# Altium PCB Analog_mic_breakout_rev.PcbDoc
Units mm, origin at the board's own origin, x right, y up, seen from the top; angles counter-clockwise.
Board outline 4.11 x 9 mm, 2 copper layers (Top Layer, Bottom Layer); 6 components, 4 nets, 15 pads, 2 vias.
Unrouted connection lines stored in the file: 6.
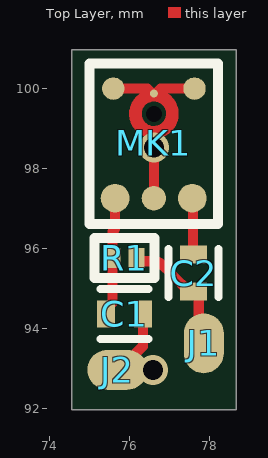
[diagram p0: Top Layer view]
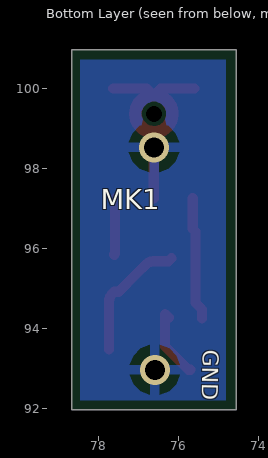
[diagram p1: Bottom Layer view, seen from below]
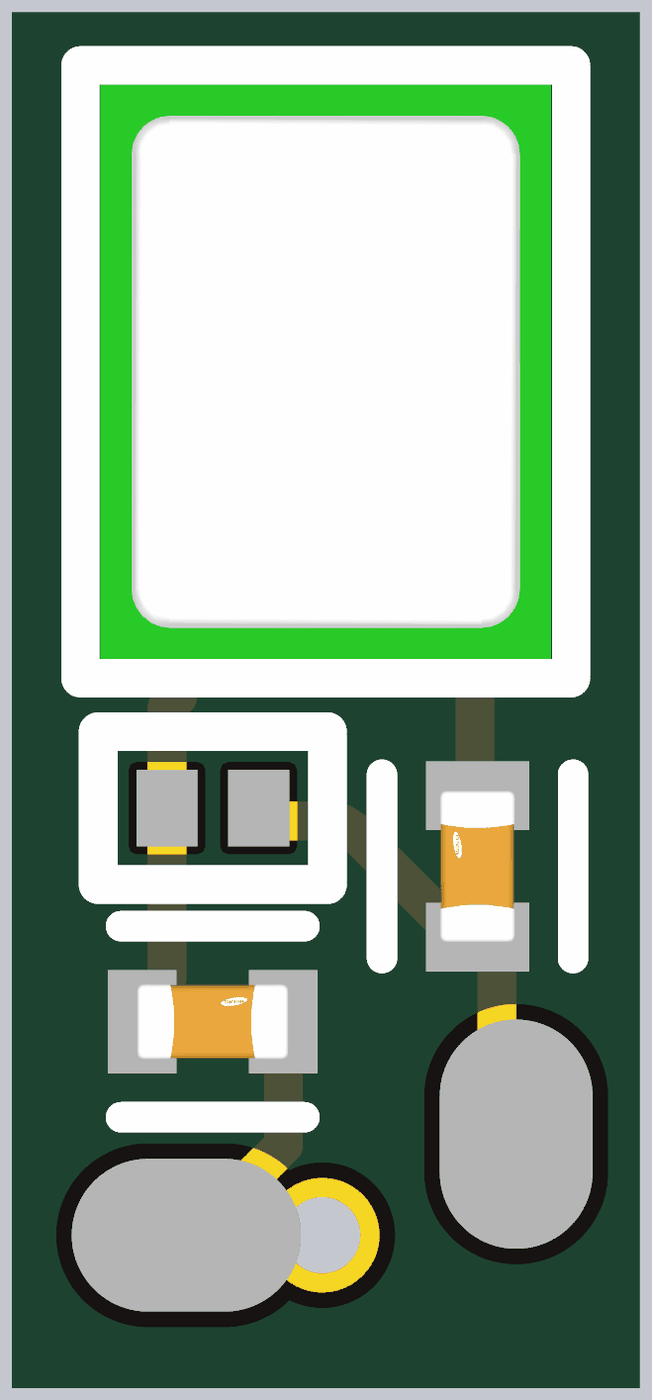
[diagram p2: 3D render of the assembled board from above, using the file's embedded part models]

## Layer stack, top to bottom
Top Solder: solder mask 0.0102, Solder Resist, Dk 3.5
Top Layer: signal copper 0.0356
Dielectric 1: dielectric 0.32, FR-4, Dk 4.8
Bottom Layer: signal copper 0.0356
Bottom Solder: solder mask 0.0102, Solder Resist, Dk 3.5

## Board outline
74.549,91.963 74.549,100.965 78.659,100.965 78.659,91.963

## Design rules (kind name [scope] priority, off if disabled: settings)
Clearance [All] p1: gap=0.1 ignorepadtopadclearanceinfootprint=FALSE except(0: Arc-Hole Track-Hole SMDPad-Hole THPad-Hole Via-Hole Fill-Hole Poly-Hole Region-Hole Text-Hole)
HoleToHoleClearance [All] p1: gap=0.1 allowstackedmicrovias=TRUE
MinimumSolderMaskSliver [All] p1: minsoldermaskwidth=0.08
PolygonConnect [All] p1: connectstyle=Relief reliefconductorwidth=0.254 reliefentries=4 polygonreliefangle="90 Angle" airgapwidth=0.254
RoomDefinition Analog_mic_breakout [InComponentClass('Analog_mic_breakout')] p1: confinementstyle=ConfineIn formatcopy=TRUE lockcomponents=FALSE outline 0,0 50.8,0 50.8,25.4 0,25.4
RoutingVias [All] p1: holewidth=0.711 width=1.27 viastyle="Through Hole" minholewidth=0.711 minwidth=1.27 maxholewidth=0.711 maxwidth=1.27
SilkToSolderMaskClearance [IsPad] p1: minsilkscreentomaskgap=0.1 clearancetoexposedcopper=TRUE
SolderMaskExpansion [All] p1: expansion=0.102 istentingtop=FALSE
Width [All] p1: maxlimit=0.315 minlimit=0.15 preferedwidth=0.254
27 further rules are at their usual default settings.

## Components (designator, comment, footprint, x,y, rotation, side; value= is the part's Value field where it differs from the comment)
C1 "CL05A106MP5NUNC" FP-CL05A106MP5NUNC-MFG 75.865,94.361 r0 top value=10uF
C2 "CL05A106MP5NUNC" FP-CL05A106MP5NUNC-MFG 77.597,95.377 r90 top value=10uF
J1 "Pad" Pad 77.85,93.625 r180 top
J2 "Pad" Pad 75.692,92.964 r270 top
MK1 "AMM-3738-B-R" 665-AMM-3738-B-R 76.604,99.363 r0 top
R1 "TNPW04023K97BEED" TNPW04023K97BEED 75.865,95.758 r180 top

## Footprints (in the part's own frame and the unit in brackets; to place one, negate y for a bottom-side part, rotate by r counter-clockwise, add the part's x,y. Pads: shape width x height; smd on the part's side, far side on the other; paste and mask are expansions set on the pad)
665-AMM-3738-B-R [mm] "Analog MEMS Microphone"
  round 0.72 smd: 1(0.96,-2.11) 4(-0.97,-2.11)
  round 0.56 smd mask+0.102: 2(1.015,0.63)
  round 0.56 smd: 3(-1.015,0.63)
  round 0.61 smd: 5(0,-2.11)
  round 0.2 smd: 6(0,0.508)
  Top Layer lines w0.315: 0.004,-0.462 cw(c0,0) 0.463,0 ; 0.004,-0.462 ccw(c0,0) 0.421,-0.192 ccw(c0,0) 0.463,0 ; 0.004,-0.462 ccw(c0,0) 0.463,0
  silkscreen extent -1.61,-2.76 1.6,1.25, body extent -1.48,-2.63 1.47,1.13, height 1.11
FP-CL05A106MP5NUNC-MFG [mm]
  rect 0.45x0.675 smd paste+0 mask+0: 1(-0.462,0) 2(0.462,0)
  silkscreen extent -0.6,-0.63 0.6,0.63, body extent -0.79,-0.45 0.79,0.45, height 0.25
Pad [mm]
  oval 1x1.5 smd: 1(0,0)
TNPW04023K97BEED [mm] "3.97K OHM resistor 0.1% 1/16W 0402 imperial"
  rect 0.4x0.5 smd mask+0.052: 1(-0.3,0) 2(0.3,0)
  silkscreen extent -0.75,-0.5 0.75,0.5

## Part data
C1 C2: library part CMP-13271-000002-1, "CAP CER 10UF 10V X5R 0402", Capacitance=10uF, Manufacturer=Samsung, Temperature="-55°C to +85°C", Temperature Characteristic=X5R, Temperature Coefficient=15%, Temperature Range High=+85°C, Temperature Range Low=-55°C, Tolerance=20%, Voltage Rating=10V, Automotive=No, Category=Cap, ComponentLink2Description=Datasheet, ComponentLink2URL=http://www.samsungsem.com/kr/support/product-search/mlcc/__icsFiles/afieldfile/2019/05/10/19-CL05A106MP5NUNC.pdf, Device Class L1="Passive Components", Device Class L2=Capacitors, Device Class L3="Ceramic Capacitors", Digikey Description="CAP CER 10UF 10V X5R 0402", Height=0.7mm, Ipc Land Pattern Name=CAPC10050X50, Lead Free=Yes, Manufacturer Part Number=CL05A106MP5NUNC, Material=Ceramic, Octopart=https://octopart.com/cl05a106mp5nunc-samsung-22457395, Package=CL05A106MP5NUNC, RoHS=TRUE
MK1: Manufacturer="PUI Audio", Supplier Part Number 1=665-AMM-3738-B-R, Supplier 1=Mouser
R1: "3.97K OHM resistor 0.1% 1/16W 0402"

## Free pads (board coordinates)
  round 0.1 hole 0.4 unplated: 13(76.604,99.363)

## Via types
v1: diameter 0.75, hole 0.5, Top Layer to Bottom Layer, 2 vias

## Nets (pads, with @x,y where several pads share a name; then routed paths per layer and width w, separated by ;. In a path a pad name is that pad's centre, name@x,y a point inside that pad or via, vN(x,y) a via of type N, cw(c..) or ccw(c..) an arc to the next point about the centre after c; other vN are vias at no path point)
GND: C1.2 J2.1 MK1.2 MK1.3 MK1.5 MK1.6 | length 5.8
  Top Layer w0.254: MK1.3@75.593,99.995 76.44,99.995 MK1.6@76.608,99.827 ; J2.1 75.74,92.964 76.327,93.551 C1.2 C1.2@76.229,94.263 ; v1@76.564,98.578 v1(76.6,98.525) ; MK1.5 76.608,97.257 76.608,98.525 76.608,98.901 ; MK1.6@76.608,99.873 MK1.6@76.608,99.827 ; MK1.2@77.623,99.995 76.776,99.995 76.638,99.857 MK1.6@76.608,99.827
  other v1: 76.581,92.964
NetC1_1: C1.1 MK1.4 R1.2 | length 3.1
  Top Layer w0.254: C1.1@75.402,94.249 C1.1 75.402,94.473 75.565,94.636 R1.2 75.565,96.415 75.634,96.484 MK1.4
NetC2_1: C2.1 J1.1 R1.1 | length 3.3
  Top Layer w0.254: R1.1 76.165,95.748 76.238,95.675 76.619,95.675 cw(c76.619,95.421) 76.797,95.602 77.055,95.344 77.485,94.914 C2.1 77.65,94.862 cw(c77.47,94.682) 77.724,94.682 J1.1@77.724,93.472
NetC2_2: C2.2 MK1.1 | length 1.4
  Top Layer w0.254: MK1.1 77.58,97.236 77.58,95.856 C2.2

## Polygon pours and split planes (outlines as drawn)
GND on Bottom Layer "GND_L02_P000" (solid, pour order 0): 74.803,100.711 78.45,100.711 78.45,92.202 74.803,92.202

## Silkscreen, mask and mechanical layers (free items; w line width, h text height)
Bottom Overlay:
  text "GND" at 75.387,93.458 h0.4 r91
Mechanical 1:
  the board outline again, w0.254